# EAGLE board Headphone-Amplifier-ClassAB-alt4 (EAGLE 7.6.0)
4x4 - Three Transistor Headphone Amplifier - Class AB http://www.electronics-diy.com/4x4.php
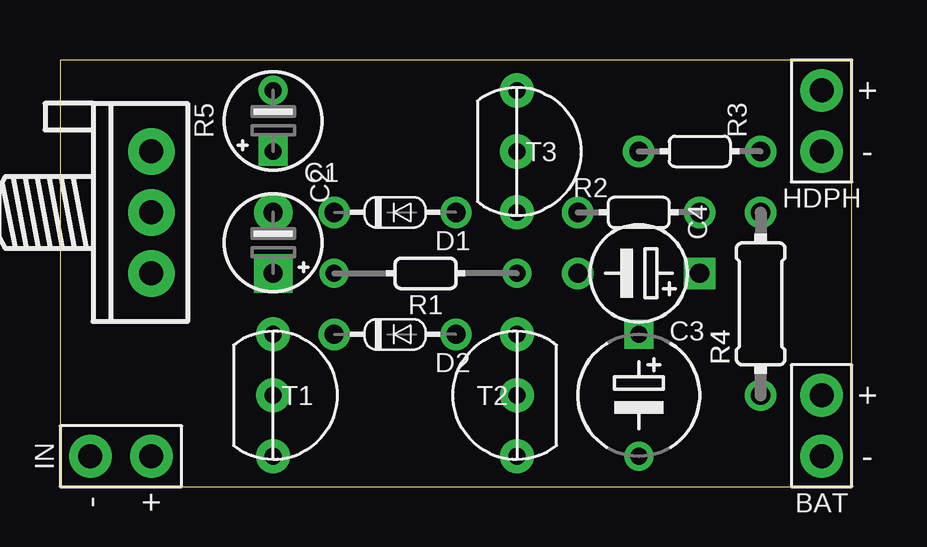
[diagram p0: board, top side]
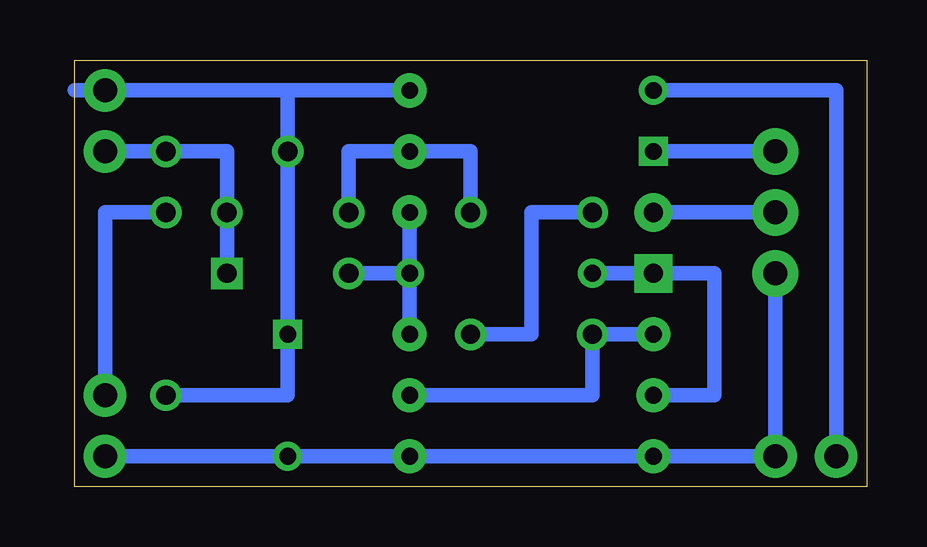
[diagram p1: board, bottom side, seen from below]

Size 33.02 x 17.78 mm. Coordinates in mm from the lower left corner, seen from the top.
Outline: 0,0 33.02,0 33.02,17.78 0,17.78 0,0
Copper layers (1*16): Top 0.035mm / dielectric 1.5mm / Bottom 0.035mm
Design rules "default": minimum track width 10mil, minimum drill 24mil, track to track 8mil, track to pad 8mil, pad to pad 8mil, via to via 8mil, smd to smd 8mil, copper to edge 40mil, drill to drill 8mil, minimum pad ring 10mil, minimum via ring 8mil, stop-mask expansion 4mil, vias tented up to drill 0mil, thermal gap 10mil
Net classes: 0 default: width 0.61 mm

## Footprints (pad centres in the part's own frame; a part is rotated, then mirrored left to right if it is on the bottom)
SPAD+- = drill 1 pad 1.778: 1 0,-1.27; 2 0,1.27
E2.5-4/V = drill 0.7 square: + 0,1.27 | drill 0.7: - 0,-1.27
E2,5-4 = drill 0.8 pad 1.6 square: + 0,1.27 | drill 0.8 pad 1.6: - 0,-1.27
E5-5/V = drill 0.7 square: + 0,2.54 | drill 0.7: - 0,-2.54
E5-4 = drill 0.8 square: + 0,2.54 | drill 0.8: - 0,-2.54
DO34-5 = drill 0.8: A 2.54,0; C -2.54,0
0202/7 = drill 0.7: 1 0,3.81; 2 0,-3.81
0202/5 = drill 0.8: 1 -2.54,0; 2 2.54,0
0202/5-V = drill 0.8: 1 0,2.54; 2 0,-2.54
0204/7 = drill 0.8: 1 -3.81,0; 2 3.81,0
POT = drill 1 pad 1.93: 1 -2.54,0; 2 0,0; 3 2.54,0
TO92-CBE = drill 0.7 pad 1.422: B 0,0; C 0,2.54; E 0,-2.54

## Placement (x,y rotation side)
BAT  SPAD+-+-  [SPAD+-]  31.75,2.54 0 top
C1  4.7uF  [E2.5-4/V]  8.89,15.24 180 top
C2  4.7uF  [E2,5-4]  8.89,10.16 180 top
C3  100-1000uF  [E5-5/V]  24.13,3.81 0 top
C4  220uF  [E5-4]  24.13,8.89 270 top
D1  1N4148  [DO34-5]  13.97,11.43 0 top
D2  1N4148  [DO34-5]  13.97,6.35 0 top
HDPH  SPAD+-+-  [SPAD+-]  31.75,15.24 0 top
IN  SPAD+-+-  [SPAD+-]  2.54,1.27 270 top
R1  100k  [0202/7]  15.24,8.89 90 top
R2  330  [0202/5]  24.13,11.43 0 top
R3  100  [0202/5-V]  26.67,13.97 270 top
R4  22  [0204/7]  29.21,7.62 90 top
R5  100k  [POT]  3.81,11.43 270 top
T1  BC547  [TO92-CBE]  8.89,3.81 0 top
T2  BC557  [TO92-CBE]  19.05,3.81 180 top
T3  BC547  [TO92-CBE]  19.05,13.97 0 top

## Library data of the parts
BAT HDPH IN = pad
C1-C4 = c
D1 D2 = d
R1-R5 = r
T1-T3 = t

## Nets
GND: BAT.1 C3.- IN.2 R5.3 T1.E T2.C
N$1: D1.A R2.1 T3.B
N$2: D2.C T1.C T2.B
N$3: D1.C D2.A
N$4: C4.- R1.2 T2.E T3.E
N$5: C1.+ R5.1
N$6: C2.- R5.2
N$7: C2.+ R1.1 T1.B
N$8: C3.+ HDPH.2 R3.2 R4.1 T3.C
N$9: C4.+ HDPH.1 R2.2 R3.1
N$10: C1.- IN.1
V+: BAT.2 R4.2

## Tracks (layer width: path | path; a pad name or v marks a point on that pad's centre or on a via)
GND
  Bottom 0.61: BAT.1 C3.- T2.C T1.E IN.2 R5.3
N$1
  Bottom 0.61: R2.1 21.59,13.97 T3.B 16.51,13.97 D1.A
N$2
  Bottom 0.61: T2.B 11.43,3.81 D2.C T1.C
N$3
  Bottom 0.61: D2.A 13.97,6.35 13.97,11.43 D1.C
N$4
  Bottom 0.61: R1.2 T3.E | C4.- R1.2 | T2.E R1.2
N$5
  Bottom 0.61: R5.1 C1.+
N$6
  Bottom 0.61: C2.- R5.2
N$7
  Bottom 0.61: R1.1 C2.+ 6.35,8.89 6.35,3.81 T1.B
N$8
  Bottom 0.61: R4.1 24.13,3.81 C3.+ R3.2 24.13,16.51 | 24.13,16.51 T3.C | 24.13,16.51 HDPH.2 33.02,16.51
N$9
  Bottom 0.61: R3.1 26.67,13.97 R2.2 C4.+ | 30.48,13.97 R3.1 | R3.1 HDPH.1
N$10
  Bottom 0.61: C1.- 1.27,16.51 IN.1
V+
  Bottom 0.61: BAT.2 31.75,11.43 R4.2